# EAGLE board barrieren-a-2 (EAGLE 9.6.2)

Size 71.12 x 80 mm. Coordinates in mm from the lower left corner, seen from the top.
Outline: 0,0 71.12,0 71.12,80 0,80 0,0
Copper layers (1*16): Top 0.035mm / dielectric 1.5mm / Bottom 0.035mm
Design rules "SeeedStudio_2layer_DRU_no_angle_20140221": minimum track width 6mil, minimum drill 12mil, track to track 6mil, track to pad 6mil, pad to pad 6mil, via to via 6mil, smd to smd 0mil, copper to edge 10mil, drill to drill 10mil, minimum pad ring 10mil, minimum via ring 6mil, stop-mask expansion 2mil, vias tented up to drill 100mil, thermal gap 10mil

## Footprints (pad centres in the part's own frame; a part is rotated, then mirrored left to right if it is on the bottom)
3,3 = hole 3.3: 0,0
CHIPLED_0603 = smd 0.8 x 0.8: A 0,-0.75; C 0,0.75
DIL16 = drill 0.813 offset: 1 -8.89,-3.81; 2 -6.35,-3.81; 3 -3.81,-3.81; 4 -1.27,-3.81; 5 1.27,-3.81; 6 3.81,-3.81; 7 6.35,-3.81; 8 8.89,-3.81; 9 8.89,3.81; 10 6.35,3.81; 11 3.81,3.81; 12 1.27,3.81; 13 -1.27,3.81; 14 -3.81,3.81; 15 -6.35,3.81; 16 -8.89,3.81
SOT23-PCH = smd 1 x 1.4: 1 -0.95,-1.1; 2 0.95,-1.1; 3 0,1.1
R0805 = smd 1.3 x 1.5: 1 -0.95,0; 2 0.95,0
PHNX_4P_350 = drill 0.991 pad 1.499: 1 0,0; 2 3.5,0; 3 7,0; 4 10.5,0

## Placement (x,y rotation side)
H1  MOUNT-HOLE3.3  [3,3]  31.62,88.9 0 bottom  (outside the outline)
H2  MOUNT-HOLE3.3  [3,3]  4.95,5.08 0 bottom
H3  MOUNT-HOLE3.3  [3,3]  66.04,5.08 0 bottom
H4  MOUNT-HOLE3.3  [3,3]  34.29,74.93 0 bottom
LED1  [CHIPLED_0603]  25.5,42 270 top
LED2  [CHIPLED_0603]  25.5,38.5 270 top
LED3  [CHIPLED_0603]  25.5,35 270 top
LED4  [CHIPLED_0603]  25.5,31.5 270 top
LED5  [CHIPLED_0603]  25.5,25.5 270 top
LED6  [CHIPLED_0603]  25.5,22 270 top
LED7  [CHIPLED_0603]  24.5,75 270 top
LED8  [CHIPLED_0603]  24.5,71.5 270 top
LED9  [CHIPLED_0603]  24.5,68 270 top
LED10  [CHIPLED_0603]  24.5,64.5 270 top
LED11  [CHIPLED_0603]  24.5,58.5 270 top
LED12  [CHIPLED_0603]  24.5,55 270 top
OK1  PC847  [DIL16]  44.45,67.31 270 top
OK2  PC847  [DIL16]  39.37,48.26 0 top
OK3  PC847  [DIL16]  39.37,7.62 0 top
Q1  BSS84  [SOT23-PCH]  33.02,35.56 90 top
Q2  BSS84  [SOT23-PCH]  33.02,30.48 90 top
Q3  BSS84  [SOT23-PCH]  33.02,25.4 90 top
Q4  BSS84  [SOT23-PCH]  33.02,20.32 90 top
Q5  BSS84  [SOT23-PCH]  24.13,16.51 0 top
Q6  BSS84  [SOT23-PCH]  19.05,16.51 0 top
R1  1k5  [R0805]  53,43.5 180 top
R2  1k5  [R0805]  53,40 180 top
R3  1k5  [R0805]  59.69,7.62 270 top
R4  1k5  [R0805]  57.15,7.62 270 top
R5  1k5  [R0805]  54.61,7.62 270 top
R6  1k5  [R0805]  52.07,7.62 270 top
R7  100k  [R0805]  41.91,35.56 90 top
R8  100k  [R0805]  41.91,30.48 90 top
R9  100k  [R0805]  41.91,25.4 90 top
R10  100k  [R0805]  41.91,20.32 90 top
R11  100k  [R0805]  24.13,7.62 0 top
R12  100k  [R0805]  19.05,7.62 0 top
R13  10k  [R0805]  19.5,43.5 180 top
R14  10k  [R0805]  19.5,40 180 top
R15  10k  [R0805]  19.5,36.5 180 top
R16  10k  [R0805]  19.5,33 180 top
R17  10k  [R0805]  19.5,27 180 top
R18  10k  [R0805]  19.5,23.5 180 top
R19  100k  [R0805]  38.1,35.56 90 top
R20  100k  [R0805]  38.1,30.48 90 top
R21  100k  [R0805]  38.1,25.4 90 top
R22  100k  [R0805]  38.1,20.32 90 top
R23  100k  [R0805]  24.13,11.43 0 top
R24  100k  [R0805]  19.05,11.43 0 top
R25  5k  [R0805]  17,76.5 180 top
R26  5k  [R0805]  33.02,68.58 180 top
R27  5k  [R0805]  17,73 180 top
R28  5k  [R0805]  33.02,66.04 180 top
R29  5k  [R0805]  17,69.5 180 top
R30  5k  [R0805]  33.02,63.5 180 top
R31  5k  [R0805]  17,66 180 top
R32  5k  [R0805]  33.02,60.96 180 top
R33  5k  [R0805]  17,60 180 top
R34  5k  [R0805]  21.59,49.53 180 top
R35  5k  [R0805]  17,56.5 180 top
R36  5k  [R0805]  21.59,52.07 180 top
R37  100  [R0805]  53,73.5 180 top
R38  100  [R0805]  53,70 180 top
R39  100  [R0805]  53,66.5 180 top
R40  100  [R0805]  53,63 180 top
R41  100  [R0805]  53,57.5 180 top
R42  100  [R0805]  53,53.5 180 top
X1  PHNX_4P_350CONN_1984989_PXC  [PHNX_4P_350]  66,31.5 90 top
X2  PHNX_4P_350CONN_1984989_PXC  [PHNX_4P_350]  66,15 90 top
X3  PHNX_4P_350CONN_1984989_PXC  [PHNX_4P_350]  5,42 270 top
X4  PHNX_4P_350CONN_1984989_PXC  [PHNX_4P_350]  5,25.5 270 top
X5  PHNX_4P_350CONN_1984989_PXC  [PHNX_4P_350]  5,75 270 top
X6  PHNX_4P_350CONN_1984989_PXC  [PHNX_4P_350]  5,58.5 270 top
X7  PHNX_4P_350CONN_1984989_PXC  [PHNX_4P_350]  66,64.5 90 top
X8  PHNX_4P_350CONN_1984989_PXC  [PHNX_4P_350]  66,48 90 top

## Library data of the parts
H1-H4 = holes
LED1-LED12 = led
OK1-OK3 = optocoupler; OC_FARNELL: 9707735; OC_NEWARK: unknown
Q1-Q6 = eagleparts
R1-R42 = rcl; SPICEPREFIX: R
X1-X8 = eagleparts; COPYRIGHT: Copyright (C) 2023 Ultra Librarian. All rights reserved.; MANUFACTURER_PART_NUMBER: 1984989; MFR_NAME: Phoenix Contact

## Nets
+12V: R13.2 R14.2 R15.2 R16.2 R17.2 R18.2 X4.3
+15V: R1.1 R2.1 R3.1 R4.1 R5.1 R6.1 X2.1 X2.2
+24V: Q1.2 Q2.2 Q3.2 Q4.2 Q5.2 Q6.2 R19.2 R20.2 R21.2 R22.2 R23.2 R24.2 X4.4
AGND: OK1.9 OK1.11 OK1.13 OK1.15 OK2.13 OK2.15 X8.1 X8.2
B1-ACT-CL: R25.2 R26.2 X5.1
B1-ACT-CL-RM: R37.1 X7.4
B1-ACT-OP: R27.2 R28.2 X5.2
B1-ACT-OP-RM: R38.1 X7.3
B1-IS-CL: Q1.3 X3.1
B1-IS-CL-SCH: OK2.6 X1.4
B1-IS-OP: Q2.3 X3.2
B1-IS-OP-SCH: OK2.8 X1.3
B2-ACT-CL: R29.2 R30.2 X5.3
B2-ACT-CL-RM: R39.1 X7.2
B2-ACT-OP: R31.2 R32.2 X5.4
B2-ACT-OP-RM: R40.1 X7.1
B2-IS-CL: Q3.3 X3.3
B2-IS-CL-SCH: OK3.8 X1.2
B2-IS-OP: Q4.3 X3.4
B2-IS-OP-SCH: OK3.6 X1.1
B3-ACT-CL: R33.2 R34.2 X6.1
B3-ACT-CL-RM: R41.1 X8.4
B3-ACT-OP: R35.2 R36.2 X6.2
B3-ACT-OP-RM: R42.1 X8.3
B3-IS-CL: Q5.3 X4.1
B3-IS-CL-SCH: OK3.4 X2.4
B3-IS-OP: Q6.3 X4.2
B3-IS-OP-SCH: OK3.2 X2.3
GND: LED7.C LED8.C LED9.C LED10.C LED11.C LED12.C OK1.2 OK1.4 OK1.6 OK1.8 OK2.2 OK2.4 OK2.9 OK2.11 OK3.9 OK3.11 OK3.13 OK3.15 X6.3 X6.4
N$1: Q1.1 R7.1 R19.1
N$2: OK2.1 R34.1
N$3: LED12.A R35.1
N$4: LED11.A R33.1
N$5: OK2.5 R1.2
N$6: OK1.12 R39.2
N$7: OK2.3 R36.1
N$8: OK2.7 R2.2
N$9: OK1.10 R40.2
N$10: OK1.5 R30.1
N$11: LED1.A R13.1
N$12: LED2.A R14.1
N$13: LED2.C OK2.10 R8.2
N$14: Q2.1 R8.1 R20.1
N$15: OK3.7 R3.2
N$16: OK1.7 R32.1
N$17: LED9.A R29.1
N$18: LED3.A R15.1
N$19: OK2.16 R41.2
N$20: LED3.C OK3.10 R9.2
N$21: OK2.14 R42.2
N$22: Q3.1 R9.1 R21.1
N$23: OK3.5 R4.2
N$24: LED10.A R31.1
N$29: LED4.A R16.1
N$30: OK1.16 R37.2
N$31: LED1.C OK2.12 R7.2
N$32: OK1.14 R38.2
N$33: OK1.1 R26.1
N$34: LED4.C OK3.12 R10.2
N$35: OK1.3 R28.1
N$36: LED7.A R25.1
N$37: LED8.A R27.1
N$40: Q4.1 R10.1 R22.1
N$41: OK3.3 R5.2
N$42: LED5.A R17.1
N$43: LED5.C OK3.14 R11.2
N$44: Q5.1 R11.1 R23.1
N$45: OK3.1 R6.2
N$46: LED6.A R18.1
N$47: LED6.C OK3.16 R12.2
N$48: Q6.1 R12.1 R24.1

## Tracks (layer width: path | path; a pad name or v marks a point on that pad's centre or on a via)
+12V  (6 unrouted)
+15V  (7 unrouted)
+24V  (12 unrouted)
AGND  (7 unrouted)
B1-ACT-CL  (2 unrouted)
B1-ACT-CL-RM  (1 unrouted)
B1-ACT-OP  (2 unrouted)
B1-ACT-OP-RM  (1 unrouted)
B1-IS-CL  (1 unrouted)
B1-IS-CL-SCH  (1 unrouted)
B1-IS-OP  (1 unrouted)
B1-IS-OP-SCH  (1 unrouted)
B2-ACT-CL  (2 unrouted)
B2-ACT-CL-RM  (1 unrouted)
B2-ACT-OP  (2 unrouted)
B2-ACT-OP-RM  (1 unrouted)
B2-IS-CL  (1 unrouted)
B2-IS-CL-SCH  (1 unrouted)
B2-IS-OP  (1 unrouted)
B2-IS-OP-SCH  (1 unrouted)
B3-ACT-CL  (2 unrouted)
B3-ACT-CL-RM  (1 unrouted)
B3-ACT-OP  (2 unrouted)
B3-ACT-OP-RM  (1 unrouted)
B3-IS-CL  (1 unrouted)
B3-IS-CL-SCH  (1 unrouted)
B3-IS-OP  (1 unrouted)
B3-IS-OP-SCH  (1 unrouted)
GND  (19 unrouted)
N$1  (2 unrouted)
N$2  (1 unrouted)
N$3  (1 unrouted)
N$4  (1 unrouted)
N$5  (1 unrouted)
N$6  (1 unrouted)
N$7  (1 unrouted)
N$8  (1 unrouted)
N$9  (1 unrouted)
N$10  (1 unrouted)
N$11  (1 unrouted)
N$12  (1 unrouted)
N$13  (2 unrouted)
N$14  (2 unrouted)
N$15  (1 unrouted)
N$16  (1 unrouted)
N$17  (1 unrouted)
N$18  (1 unrouted)
N$19  (1 unrouted)
N$20  (2 unrouted)
N$21  (1 unrouted)
N$22  (2 unrouted)
N$23  (1 unrouted)
N$24  (1 unrouted)
N$29  (1 unrouted)
N$30  (1 unrouted)
N$31  (2 unrouted)
N$32  (1 unrouted)
N$33  (1 unrouted)
N$34  (2 unrouted)
N$35  (1 unrouted)
N$36  (1 unrouted)
N$37  (1 unrouted)
N$40  (2 unrouted)
N$41  (1 unrouted)
N$42  (1 unrouted)
N$43  (2 unrouted)
N$44  (2 unrouted)
N$45  (1 unrouted)
N$46  (1 unrouted)
N$47  (2 unrouted)
N$48  (2 unrouted)

## Text on the board
tNames: (c) Balazs Racz 20240601 | 919.01>B1:=- | RM B1:=- | 917.01>B1:=/ | RM B1:=/ | 925.01>B2:=- | RM B2:=- | 922.01>B2:=/ | RM B2:=/ | RM B3:=- | 931.01>B3:=- | 930.01>B3:=/ | RM B3:=/ | GND | Masse | GND | Masse | 920.01<B1==- | Sch B1==- | 918.01<B1==/ | Sch B1==/ | 923.01<B2==- | Sch B2==- | 921.01<B2==/ | Sch B2==/ | 926.01<B3==- | Sch B3==- | 924.01<B3==/ | Sch B3==/ | Barrierenadapter | V+ | V+